# EAGLE board CT_schematic (EAGLE 7.6.0)

Size 100 x 80 mm. Coordinates in mm from the lower left corner, seen from the top.
Outline: 0,0 100,0 100,80 0,80 0,0
Copper layers (1*16): Top 0.035mm / dielectric 1.5mm / Bottom 0.035mm
Design rules "default": minimum track width 10mil, minimum drill 24mil, track to track 8mil, track to pad 8mil, pad to pad 8mil, via to via 8mil, smd to smd 8mil, copper to edge 40mil, drill to drill 8mil, minimum pad ring 10mil, minimum via ring 8mil, stop-mask expansion 4mil, vias tented up to drill 0mil, thermal gap 10mil

## Footprints (pad centres in the part's own frame; a part is rotated, then mirrored left to right if it is on the bottom)
C0603 = smd 0.8 x 0.8: 1 -0.762,0; 2 0.762,0
C0402 = smd 0.5 x 0.5: 1 -0.508,0; 2 0.508,0
C0805 = smd 1.2 x 1.3: 1 -1.016,0; 2 1.016,0
C1206 = smd 1.3 x 1.6: 1 -1.524,0; 2 1.524,0
L1210 = smd 1.2 x 2.5: 1 -1.524,0; 2 1.524,0
DR1040 = smd 1.6 x 3.2: 1 -4.458,0; 2 4.458,0
R0603 = smd 0.8 x 0.8: 1 -0.762,0; 2 0.762,0
LQFP144 = smd 0.35 x 1.35: 1 -8.75,-10.625; 2 -8.25,-10.625; 3 -7.75,-10.625; 4 -7.25,-10.625; 5 -6.75,-10.625; 6 -6.25,-10.625; 7 -5.75,-10.625; 8 -5.25,-10.625; 9 -4.75,-10.625; 10 -4.25,-10.625; 11 -3.75,-10.625; 12 -3.25,-10.625; 13 -2.75,-10.62; 14 -2.25,-10.625; 15 -1.75,-10.625; 16 -1.25,-10.625; 17 -0.75,-10.625; 18 -0.25,-10.625; 19 0.25,-10.625; 20 0.75,-10.625; 21 1.25,-10.625; 22 1.75,-10.625; 23 2.25,-10.625; 24 2.75,-10.62; 25 3.25,-10.625; 26 3.75,-10.625; 27 4.25,-10.625; 28 4.75,-10.625; 29 5.25,-10.625; 30 5.75,-10.625; 31 6.25,-10.625; 32 6.75,-10.625; 33 7.25,-10.625; 34 7.75,-10.625; 35 8.25,-10.625; 36 8.75,-10.625; 73 8.75,10.625; 74 8.25,10.625; 75 7.75,10.625; 76 7.25,10.625; 77 6.75,10.625; 78 6.25,10.625; 79 5.75,10.625; 80 5.25,10.625; 81 4.75,10.625; 82 4.25,10.625; 83 3.75,10.625; 84 3.25,10.625; 85 2.75,10.625; 86 2.25,10.625; 87 1.75,10.625; 88 1.25,10.625; 89 0.75,10.625; 90 0.25,10.625; 91 -0.25,10.625; 92 -0.75,10.625; 93 -1.25,10.625; 94 -1.75,10.625; 95 -2.25,10.625; 96 -2.75,10.625; 97 -3.25,10.625; 98 -3.75,10.625; 99 -4.25,10.625; 100 -4.75,10.625; 101 -5.25,10.625; 102 -5.75,10.625; 103 -6.25,10.625; 104 -6.75,10.625; 105 -7.25,10.625; 106 -7.75,10.625; 107 -8.25,10.625; 108 -8.75,10.625 | smd 1.35 x 0.35: 37 10.625,-8.75; 38 10.625,-8.25; 39 10.625,-7.75; 40 10.625,-7.25; 41 10.625,-6.75; 42 10.625,-6.25; 43 10.625,-5.75; 44 10.625,-5.25; 45 10.625,-4.75; 46 10.625,-4.25; 47 10.625,-3.75; 48 10.625,-3.25; 49 10.625,-2.75; 50 10.625,-2.25; 51 10.625,-1.75; 52 10.625,-1.25; 53 10.625,-0.75; 54 10.625,-0.25; 55 10.625,0.25; 56 10.625,0.75; 57 10.625,1.25; 58 10.625,1.75; 59 10.625,2.25; 60 10.625,2.75; 61 10.625,3.25; 62 10.625,3.75; 63 10.625,4.25; 64 10.625,4.75; 65 10.625,5.25; 66 10.625,5.75; 67 10.625,6.25; 68 10.625,6.75; 69 10.625,7.25; 70 10.625,7.75; 71 10.625,8.25; 72 10.625,8.75; 109 -10.625,8.75; 110 -10.625,8.25; 111 -10.625,7.75; 112 -10.625,7.25; 113 -10.625,6.75; 114 -10.625,6.25; 115 -10.625,5.75; 116 -10.625,5.25; 117 -10.625,4.75; 118 -10.625,4.25; 119 -10.625,3.75; 120 -10.625,3.25; 121 -10.625,2.75; 122 -10.625,2.25; 123 -10.625,1.75; 124 -10.625,1.25; 125 -10.625,0.75; 126 -10.625,0.25; 127 -10.625,-0.25; 128 -10.625,-0.75; 129 -10.625,-1.25; 130 -10.625,-1.75; 131 -10.625,-2.25; 132 -10.625,-2.75; 133 -10.625,-3.25; 134 -10.625,-3.75; 135 -10.625,-4.25; 136 -10.625,-4.75; 137 -10.625,-5.25; 138 -10.625,-5.75; 139 -10.625,-6.25; 140 -10.625,-6.75; 141 -10.625,-7.25; 142 -10.625,-7.75; 143 -10.625,-8.25; 144 -10.625,-8.75
A2200-A = smd 1.5 x 0.8: 1 -4.85,6.35; 2 -4.85,5.08; 3 -4.85,3.81; 4 -4.85,2.54; 5 -4.85,1.27; 6 -4.85,0; 7 -4.85,-1.27; 8 -4.85,-2.54; 9 -4.85,-3.81; 10 -4.85,-5.08; 11 -4.85,-6.35; 12 4.85,-6.35; 13 4.85,-5.08; 14 4.85,-3.81; 15 4.85,-2.54; 16 4.85,-1.27; 17 4.85,0; 18 4.85,1.27; 19 4.85,2.54; 20 4.85,3.81; 21 4.85,5.08; 22 4.85,6.35 | smd 1.2 x 1.2: 23 -2,2; 24 -2,0; 25 -2,-2; 26 0,-2; 27 0,0; 28 0,2; 29 2,2; 30 2,0; 31 2,-2
COAXIAL_C = smd 1 x 1: 1 0,-1.5; 2 0,1.5 | smd 1.05 x 2.2: 3 -1.475,0; 4 1.475,0
SOIC-8 = smd 1.6 x 0.6: 1 -2.7,1.905 | smd 1.55 x 0.6: 2 -2.7,0.635; 3 -2.7,-0.635; 4 -2.7,-1.905; 5 2.7,-1.905; 6 2.7,-0.635; 7 2.7,0.635; 8 2.7,1.905
TST-110-05-T-D-RA = drill 1 pad 1.7 square: 1 0,0 | drill 1 pad 1.7: 2 0,2.54; 3 2.54,0; 4 2.54,2.54; 5 5.08,0; 6 5.08,2.54; 7 7.62,0; 8 7.62,2.54; 9 10.16,0; 10 10.16,2.54; 11 12.7,0; 12 12.7,2.54; 13 15.24,0; 14 15.24,2.54; 15 17.78,0; 16 17.78,2.54; 17 20.32,0; 18 20.32,2.54; 19 22.86,0; 20 22.86,2.54
SSOP-16 = smd 1.981 x 0.356: 1 -2.464,2.223; 2 -2.464,1.587; 3 -2.464,0.953; 4 -2.464,0.318; 5 -2.464,-0.318; 6 -2.464,-0.953; 7 -2.464,-1.587; 8 -2.464,-2.223; 9 2.464,-2.223; 10 2.464,-1.587; 11 2.464,-0.953; 12 2.464,-0.318; 13 2.464,0.318; 14 2.464,0.953; 15 2.464,1.587; 16 2.464,2.223
HTSS-105-01-G-D = drill 1 pad 1.8 square: 1 0,0 | drill 1 pad 1.8: 2 0,2.54; 3 2.54,0; 4 2.54,2.54; 5 5.08,0; 6 5.08,2.54; 7 7.62,0; 8 7.62,2.54; 9 10.16,0; 10 10.16,2.54
LBGA-64 = smd 0.559 x 0.559: A1 -3.5,3.5; A2 -2.5,3.5; A3 -1.5,3.5; A4 -0.5,3.5; A5 0.5,3.5; A6 1.5,3.5; A7 2.5,3.5; A8 3.5,3.5; B1 -3.5,2.5; B2 -2.5,2.5; B3 -1.5,2.5; B4 -0.5,2.5; B5 0.5,2.5; B6 1.5,2.5; B7 2.5,2.5; B8 3.5,2.5; C1 -3.5,1.5; C2 -2.5,1.5; C3 -1.5,1.5; C4 -0.5,1.5; C5 0.5,1.5; C6 1.5,1.5; C7 2.5,1.5; C8 3.5,1.5; D1 -3.5,0.5; D2 -2.5,0.5; D3 -1.5,0.5; D4 -0.5,0.5; D5 0.5,0.5; D6 1.5,0.5; D7 2.5,0.5; D8 3.5,0.5; E1 -3.5,-0.5; E2 -2.5,-0.5; E3 -1.5,-0.5; E4 -0.5,-0.5; E5 0.5,-0.5; E6 1.5,-0.5; E7 2.5,-0.5; E8 3.5,-0.5; F1 -3.5,-1.5; F2 -2.5,-1.5; F3 -1.5,-1.5; F4 -0.5,-1.5; F5 0.5,-1.5; F6 1.5,-1.5; F7 2.5,-1.5; F8 3.5,-1.5; G1 -3.5,-2.5; G2 -2.5,-2.5; G3 -1.5,-2.5; G4 -0.5,-2.5; G5 0.5,-2.5; G6 1.5,-2.5; G7 2.5,-2.5; G8 3.5,-2.5; H1 -3.5,-3.5; H2 -2.5,-3.5; H3 -1.5,-3.5; H4 -0.5,-3.5; H5 0.5,-3.5; H6 1.5,-3.5; H7 2.5,-3.5; H8 3.5,-3.5
ASEK = smd 1.4 x 1: 1 -1.1,-0.8; 2 1.1,-0.8; 3 1.1,0.8; 4 -1.1,0.8
ASFL1 = smd 1.7 x 1.5: 1 -1.27,-1.1; 2 1.27,-1.1; 3 1.27,1.1; 4 -1.27,1.1
TSOT-23-5 = smd 1.3 x 0.62: 1 -1.31,0.95; 2 -1.31,0; 3 -1.31,-0.95; 4 1.31,-0.95; 5 1.31,0.95
DFN8_2X3MC = smd 0.813 x 0.305: 1 -1.398,0.75; 2 -1.398,0.25; 3 -1.398,-0.25; 4 -1.398,-0.75; 5 1.398,-0.75; 6 1.398,-0.25; 7 1.398,0.25; 8 1.398,0.75 | smd 1.753 x 1.549: 9 0,0
JST-2-SMD = smd 1 x 4.6: 1 -1,-3.7; 2 1,-3.7 | smd 1.6 x 3.4: NC1 -3.4,1.5; NC2 3.4,1.5
FCI_10118193-0001LF = smd 0.4 x 1.35: 1 -1.3,2.675; 2 -0.65,2.675; 3 0,2.675; 4 0.65,2.675; 5 1.3,2.675 | smd 1.6 x 1.4: 6 -3.2,2.45; 7 3.2,2.45 | smd 1.9 x 1.9: 8 -1.2,0; 9 1.2,0 | hole 0.5: -3.3,0; 3.3,0
SON-6 = smd 0.55 x 0.3: 1 -0.355,0.5 | smd 0.52 x 0.3: 2 -0.37,0; 3 -0.37,-0.5; 4 0.37,-0.5; 5 0.37,0; 6 0.37,0.5
SW_4-1437565-2 = smd 1.4 x 2.1: 1 -2.23,4.55; 2 -2.23,-4.55; 3 2.23,4.55; 4 2.23,-4.55
LGM67K-G1J2-24-Z = smd 0.8 x 1.4: A -2,0; C 0,0
NC7SZ125M5X = smd 1.3 x 0.7: 1 -1.3,0.95; 2 -1.3,0; 3 -1.3,-0.95; 4 1.3,-0.95; 5 1.3,0.95
DUMMY_PACKAGE_204 = drill 0.3: 1 0,-1; 2 1.5,-1; 3 3,-1

## Placement (x,y rotation side)
C1  1e-06  [C0603]  -57.15,68.58 0 top  (outside the outline)
C2  1e-07  [C0603]  -60.96,68.58 0 top  (outside the outline)
C3  1e-07  [C0603]  -64.77,68.58 0 top  (outside the outline)
C4  1e-07  [C0603]  -68.58,68.58 0 top  (outside the outline)
C5  1e-07  [C0603]  -72.39,68.58 0 top  (outside the outline)
C6  1e-07  [C0603]  -76.2,68.58 0 top  (outside the outline)
C7  1e-07  [C0603]  -15.24,73.66 0 top  (outside the outline)
C8  1e-07  [C0603]  -19.05,73.66 0 top  (outside the outline)
C9  1e-07  [C0603]  -22.86,73.66 0 top  (outside the outline)
C10  1e-07  [C0603]  -26.67,73.66 0 top  (outside the outline)
C11  1e-07  [C0603]  -30.48,73.66 0 top  (outside the outline)
C12  1e-07  [C0603]  -34.29,73.66 0 top  (outside the outline)
C13  1e-07  [C0603]  -38.1,73.66 0 top  (outside the outline)
C14  4.7e-06  [C0603]  -49.53,68.58 0 top  (outside the outline)
C15  1e-07  [C0603]  -41.91,73.66 0 top  (outside the outline)
C16  1e-07  [C0603]  -45.72,73.66 0 top  (outside the outline)
C17  1e-08  [C0603]  -49.53,73.66 0 top  (outside the outline)
C18  1e-06  [C0603]  -53.34,73.66 0 top  (outside the outline)
C19  1e-07  [C0402]  -38.1,78.74 0 top  (outside the outline)
C20  1e-08  [C0402]  -41.91,78.74 0 top  (outside the outline)
C21  1e-07  [C0402]  -45.72,78.74 0 top  (outside the outline)
C22  1e-06  [C0603]  -57.15,73.66 0 top  (outside the outline)
C23  1e-06  [C0603]  -60.96,73.66 0 top  (outside the outline)
C24  2.2e-07  [C0603]  -53.34,68.58 0 top  (outside the outline)
C25  1e-06  [C0603]  -64.77,73.66 0 top  (outside the outline)
C26  1e-06  [C0603]  -68.58,73.66 0 top  (outside the outline)
C27  1e-08  [C0402]  -49.53,78.74 0 top  (outside the outline)
C28  1e-08  [C0402]  -53.34,78.74 0 top  (outside the outline)
C29  1e-08  [C0402]  -57.15,78.74 0 top  (outside the outline)
C30  1e-08  [C0402]  -60.96,78.74 0 top  (outside the outline)
C31  1e-05  [C0805]  -72.39,55.88 0 top  (outside the outline)
C32  1e-05  [C0805]  -77.47,55.88 0 top  (outside the outline)
C33  1e-07  [C0402]  -64.77,78.74 0 top  (outside the outline)
C34  1e-05  [C1206]  -35.56,57.15 0 top  (outside the outline)
C35  1e-05  [C1206]  -41.91,57.15 0 top  (outside the outline)
C36  1e-08  [C0402]  -68.58,78.74 0 top  (outside the outline)
C37  1e-08  [C0402]  -72.39,78.74 0 top  (outside the outline)
C38  1e-08  [C0402]  -76.2,78.74 0 top  (outside the outline)
C39  1e-08  [C0402]  -15.24,83.82 0 top  (outside the outline)
I1  1e-05  [L1210]  -29.21,57.15 0 top  (outside the outline)
I2  2.5e-06  [DR1040]  -38.1,29.21 0 top  (outside the outline)
R2  1000.0  [R0603]  -72.39,73.66 0 top  (outside the outline)
R4  4700.0  [R0603]  -76.2,73.66 0 top  (outside the outline)
R5  4700.0  [R0603]  -15.24,78.74 0 top  (outside the outline)
R6  4700.0  [R0603]  -19.05,78.74 0 top  (outside the outline)
R7  2200.0  [R0603]  -22.86,78.74 0 top  (outside the outline)
R8  2200.0  [R0603]  -26.67,78.74 0 top  (outside the outline)
R9  10000.0  [R0603]  -48.26,63.5 0 top  (outside the outline)
R10  10000.0  [R0603]  -53.34,63.5 0 top  (outside the outline)
R11  10000.0  [R0603]  -58.42,63.5 0 top  (outside the outline)
R12  10000.0  [R0603]  -63.5,63.5 0 top  (outside the outline)
R13  10000.0  [R0603]  -68.58,63.5 0 top  (outside the outline)
R14  10000.0  [R0603]  -73.66,63.5 0 top  (outside the outline)
R15  100000.0  [R0603]  -27.94,63.5 0 top  (outside the outline)
R16  10000.0  [R0603]  -78.74,63.5 0 top  (outside the outline)
R17  10000.0  [R0603]  -15.24,68.58 0 top  (outside the outline)
R18  10000.0  [R0603]  -20.32,68.58 0 top  (outside the outline)
R19  10000.0  [R0603]  -25.4,68.58 0 top  (outside the outline)
R20  10000.0  [R0603]  -30.48,68.58 0 top  (outside the outline)
R21  220000.0  [R0603]  -33.02,63.5 0 top  (outside the outline)
R22  1000000.0  [R0603]  -22.86,63.5 0 top  (outside the outline)
R23  10000.0  [R0603]  -35.56,68.58 0 top  (outside the outline)
R24  10000.0  [R0603]  -40.64,68.58 0 top  (outside the outline)
R25  9100.0  [R0603]  -30.48,78.74 0 top  (outside the outline)
R26  680000.0  [R0603]  -38.1,63.5 0 top  (outside the outline)
R27  120000.0  [R0603]  -43.18,63.5 0 top  (outside the outline)
R28  2000.0  [R0603]  -34.29,78.74 0 top  (outside the outline)
R29  10000.0  [R0603]  -45.72,68.58 0 top  (outside the outline)
U1  STM32L471ZET6  [LQFP144]  -24.13,11.43 0 top  (outside the outline)
U2  A2200-A  [A2200-A]  -41.91,10.16 0 top  (outside the outline)
U3  73412-0114  [COAXIAL_C]  -21.59,49.53 0 top  (outside the outline)
U4  AT25040B-SSHL-T  [SOIC-8]  -43.18,40.64 0 top  (outside the outline)
U5  TST-110-05-T-D-RA  [TST-110-05-T-D-RA]  -58.42,46.99 0 top  (outside the outline)
U6  LTC2804CGN-1#PBF  [SSOP-16]  -74.93,27.94 0 top  (outside the outline)
U7  HTSS-105-01-G-D  [HTSS-105-01-G-D]  -27.94,39.37 0 top  (outside the outline)
U8  mt28ew256aba1HPC-0SIT  [LBGA-64]  -54.61,7.62 0 top  (outside the outline)
U9  ASEK-32.768KHz-ECST  [ASEK]  -77.47,49.53 0 top  (outside the outline)
U10  ASFL1-25MHZ-NCS  [ASFL1]  -60.96,39.37 0 top  (outside the outline)
U11  ltc3406es5  [TSOT-23-5]  -15.24,62.23 0 top  (outside the outline)
U12  MCP73831T-2ACI/MC  [DFN8_2X3MC]  -30.48,82.55 0 top  (outside the outline)
U13  S2B-PH-SM4-TB(LF)(SN)  [JST-2-SMD]  -53.34,29.21 0 top  (outside the outline)
U14  10118193-0001LF  [FCI_10118193-0001LF]  -69.85,39.37 0 top  (outside the outline)
U15  TPS3895ADRYR  [SON-6]  -24.13,82.55 0 top  (outside the outline)
U16  4-1437565-2  [SW_4-1437565-2]  -27.94,29.21 0 top  (outside the outline)
U17  Q65110A2395  [LGM67K-G1J2-24-Z]  -17.78,57.15 0 top  (outside the outline)
U18  nc7sz125m5x  [NC7SZ125M5X]  -46.99,55.88 0 top  (outside the outline)
U19  nc7sz125m5x  [NC7SZ125M5X]  -53.34,55.88 0 top  (outside the outline)
U20  nc7sz125m5x  [NC7SZ125M5X]  -59.69,55.88 0 top  (outside the outline)
U21  nc7sz125m5x  [NC7SZ125M5X]  -66.04,55.88 0 top  (outside the outline)
U22  Dummy  [DUMMY_PACKAGE_204]  -21.59,83.82 0 top  (outside the outline)

## Library data of the parts
C1-C39 I1 I2 R2 R4-R29 U1-U22 = circuit_tree

## Nets
CLK_U1_8: U1.8 U9.3
CLK_U1_23: U1.23 U10.3
GND: C1.2 C2.2 C3.2 C4.2 C5.2 C6.2 C7.2 C8.2 C9.2 C10.2 C11.2 C12.2 C13.2 C14.2 C15.2 C16.2 C17.2 C18.2 C19.2 C20.2 C21.2 C22.2 C23.2 C25.2 C26.2 C27.2 C28.2 C29.2 C30.2 C31.2 C32.1 C32.2 C33.2 C34.2 C35.2 C36.2 C37.2 C38.2 C39.2 R2.2 R9.2 R21.2 R25.2 R27.2 R28.2 U1.16 U1.30 U1.31 U1.38 U1.51 U1.61 U1.71 U1.83 U1.94 U1.107 U1.120 U1.130 U1.143 U2.7 U2.8 U2.23 U2.24 U2.25 U2.26 U2.27 U2.28 U2.29 U2.30 U2.31 U4.4 U5.4 U5.6 U5.8 U5.10 U5.12 U5.14 U5.16 U5.18 U5.20 U6.8 U7.9 U8.E8 U8.H2 U8.H7 U9.2 U10.2 U11.2 U12.6 U12.9 U13.2 U14.5 U14.6 U14.7 U14.8 U14.9 U15.2 U17.C U18.2 U18.3 U19.1 U19.3 U20.1 U20.3 U21.1 U21.3 U22.1
INPUT_USBPOWER_5V: C34.1 R29.2 U12.1 U12.2 U14.1
NET_U1_25: R6.1 U1.25 U21.4
NET_U1_128: R8.1 U1.128 U2.16
NET_U1_129: R7.1 U1.129 U2.15
NET_U1_138: R9.1 U1.138
NET_U1_140: U17.A
NET_U1_142: U16.3 U16.4
NET_U2_2: R10.2 U2.2
NET_U2_6: U2.6
NET_U2_17: R10.1 U2.17
NET_U2_19: U2.19
NET_U2_22: R5.1 U2.22 U20.4
NET_U3_1: U2.11 U3.1
NET_U3_2: U2.10 U3.2 U3.3 U3.4
NET_U4_3: R11.1 U4.3
NET_U4_7: R13.1 U4.7
NET_U6_6: C22.1 U6.6
NET_U6_7: C24.1 I1.2 U6.7
NET_U6_9: C23.1 U6.9
NET_U6_10: C24.2 U6.10
NET_U6_11: R15.1 U6.11
NET_U7_3: U6.1 U7.3
NET_U7_4: U6.2 U7.4
NET_U7_5: U6.3 U7.5
NET_U7_6: U6.4 U7.6
NET_U8_B4: R19.1 U8.B4
NET_U8_B5: R4.1 U8.B5 U19.4
NET_U11_1: U11.1
NET_U11_3: I2.1 U11.3
NET_U11_5: R21.1 R22.1 U11.5
NET_U11_ATNET_3: I2.2 R22.2
NET_U12_5: R29.1 U12.5
NET_U12_8: R28.1 U12.8
NET_U15_1: R24.1 R25.1 U15.1
NET_U15_3: R26.2 R27.1 U15.3
NET_U15_4: R23.1 U15.4 U18.4 U19.2 U20.2 U21.2
NET_U16_1: R2.1 U16.1 U16.2
PROC_FMC_A0: U1.10 U8.E2
PROC_FMC_A1: U1.11 U8.D2
PROC_FMC_A2: U1.12 U8.C2
PROC_FMC_A3: U1.13 U8.A2
PROC_FMC_A4: U1.14 U8.B2
PROC_FMC_A5: U1.15 U8.D3
PROC_FMC_A6: U1.50 U8.C3
PROC_FMC_A7: U1.53 U8.A3
PROC_FMC_A8: U1.54 U8.B6
PROC_FMC_A9: U1.55 U8.A6
PROC_FMC_A10: U1.56 U8.C6
PROC_FMC_A11: U1.57 U8.D6
PROC_FMC_A12: U1.87 U8.B7
PROC_FMC_A13: U1.88 U8.A7
PROC_FMC_A14: U1.89 U8.C7
PROC_FMC_A15: U1.90 U8.D7
PROC_FMC_A16: U1.80 U8.E7
PROC_FMC_A17: U1.81 U8.B3
PROC_FMC_A18: U1.82 U8.C4
PROC_FMC_A19: U1.2 U8.D5
PROC_FMC_A20: U1.3 U8.D4
PROC_FMC_A21: U1.4 U8.C5
PROC_FMC_A22: U1.5 U8.B8
PROC_FMC_A23: U1.1 U8.C8
PROC_FMC_D0: U1.85 U8.E3
PROC_FMC_D1: U1.86 U8.H3
PROC_FMC_D2: U1.114 U8.E4
PROC_FMC_D3: U1.115 U8.H4
PROC_FMC_D4: U1.58 U8.H5
PROC_FMC_D5: U1.59 U8.E5
PROC_FMC_D6: U1.60 U8.H6
PROC_FMC_D7: U1.63 U8.E6
PROC_FMC_D8: U1.64 U8.F3
PROC_FMC_D9: U1.65 U8.G3
PROC_FMC_D10: U1.66 U8.F4
PROC_FMC_D11: U1.67 U8.G4
PROC_FMC_D12: U1.68 U8.F5
PROC_FMC_D13: U1.77 U8.G6
PROC_FMC_D14: U1.78 U8.F6
PROC_FMC_D15: U1.79 U8.G7
PROC_FMC_NBL0: R20.1 U1.141 U8.F7
PROC_FMC_NE2: R16.1 U1.124 U8.F2
PROC_FMC_NOE: R17.1 U1.118 U8.G2
PROC_FMC_NWAIT: U1.122 U8.A4
PROC_FMC_NWE: R18.1 U1.119 U8.A5
PROC_LPUART1_CTS: U1.74 U6.13
PROC_LPUART1_RTS: U1.73 U6.15
PROC_LPUART1_RX: U1.26 U6.16
PROC_LPUART1_TX: U1.27 U6.14
PROC_PC13: U1.7 U22.2
PROC_PC15_OSC32_OUT: U1.9 U22.3
PROC_SPI1_MISO: U1.42 U4.2
PROC_SPI1_MOSI: U1.43 U4.5
PROC_SPI1_NSS: R12.1 U1.40 U4.1
PROC_SPI1_SCK: U1.41 U4.6
PROC_SYS_JTCK_SWCLK: U1.109 U5.9
PROC_SYS_JTDO_SWO: U1.133 U5.13
PROC_SYS_JTMS_SWDIO: U1.105 U5.7
RST_OUT_U5_SRESET_B: R14.1 U5.15 U18.1
VCC_S1_3V7: C31.1 C35.1 U11.4 U12.3 U12.4 U13.1
VCC_TIER1_3V3: C1.1 C2.1 C3.1 C4.1 C5.1 C6.1 C7.1 C8.1 C9.1 C10.1 C11.1 C12.1 C13.1 C14.1 C15.1 C16.1 C17.1 C18.1 C19.1 C20.1 C21.1 C25.1 C26.1 C27.1 C28.1 C29.1 C30.1 C32.2 C33.1 C36.1 C37.1 C38.1 C39.1 I1.1 I2.2 R4.2 R5.2 R6.2 R7.2 R8.2 R11.2 R12.2 R13.2 R14.2 R15.2 R16.2 R17.2 R18.2 R19.2 R20.2 R22.2 R23.2 R24.2 R26.1 U1.6 U1.17 U1.32 U1.33 U1.39 U1.52 U1.62 U1.72 U1.84 U1.95 U1.106 U1.108 U1.121 U1.131 U1.144 U2.20 U4.8 U5.1 U6.5 U6.12 U8.D8 U8.F1 U8.G5 U9.4 U10.4 U15.6 U18.5 U19.5 U20.5 U21.5

## Tracks (layer width: path | path; a pad name or v marks a point on that pad's centre or on a via)
CLK_U1_8  (1 unrouted)
CLK_U1_23  (1 unrouted)
GND  (105 unrouted)
INPUT_USBPOWER_5V  (4 unrouted)
NET_U1_25  (2 unrouted)
NET_U1_128  (2 unrouted)
NET_U1_129  (2 unrouted)
NET_U1_138  (1 unrouted)
NET_U1_142  (1 unrouted)
NET_U2_2  (1 unrouted)
NET_U2_17  (1 unrouted)
NET_U2_22  (2 unrouted)
NET_U3_1  (1 unrouted)
NET_U3_2  (3 unrouted)
NET_U4_3  (1 unrouted)
NET_U4_7  (1 unrouted)
NET_U6_6  (1 unrouted)
NET_U6_7  (2 unrouted)
NET_U6_9  (1 unrouted)
NET_U6_10  (1 unrouted)
NET_U6_11  (1 unrouted)
NET_U7_3  (1 unrouted)
NET_U7_4  (1 unrouted)
NET_U7_5  (1 unrouted)
NET_U7_6  (1 unrouted)
NET_U8_B4  (1 unrouted)
NET_U8_B5  (2 unrouted)
NET_U11_3  (1 unrouted)
NET_U11_5  (2 unrouted)
NET_U11_ATNET_3  (1 unrouted)
NET_U12_5  (1 unrouted)
NET_U12_8  (1 unrouted)
NET_U15_1  (2 unrouted)
NET_U15_3  (2 unrouted)
NET_U15_4  (5 unrouted)
NET_U16_1  (2 unrouted)
PROC_FMC_A0  (1 unrouted)
PROC_FMC_A1  (1 unrouted)
PROC_FMC_A2  (1 unrouted)
PROC_FMC_A3  (1 unrouted)
PROC_FMC_A4  (1 unrouted)
PROC_FMC_A5  (1 unrouted)
PROC_FMC_A6  (1 unrouted)
PROC_FMC_A7  (1 unrouted)
PROC_FMC_A8  (1 unrouted)
PROC_FMC_A9  (1 unrouted)
PROC_FMC_A10  (1 unrouted)
PROC_FMC_A11  (1 unrouted)
PROC_FMC_A12  (1 unrouted)
PROC_FMC_A13  (1 unrouted)
PROC_FMC_A14  (1 unrouted)
PROC_FMC_A15  (1 unrouted)
PROC_FMC_A16  (1 unrouted)
PROC_FMC_A17  (1 unrouted)
PROC_FMC_A18  (1 unrouted)
PROC_FMC_A19  (1 unrouted)
PROC_FMC_A20  (1 unrouted)
PROC_FMC_A21  (1 unrouted)
PROC_FMC_A22  (1 unrouted)
PROC_FMC_A23  (1 unrouted)
PROC_FMC_D0  (1 unrouted)
PROC_FMC_D1  (1 unrouted)
PROC_FMC_D2  (1 unrouted)
PROC_FMC_D3  (1 unrouted)
PROC_FMC_D4  (1 unrouted)
PROC_FMC_D5  (1 unrouted)
PROC_FMC_D6  (1 unrouted)
PROC_FMC_D7  (1 unrouted)
PROC_FMC_D8  (1 unrouted)
PROC_FMC_D9  (1 unrouted)
PROC_FMC_D10  (1 unrouted)
PROC_FMC_D11  (1 unrouted)
PROC_FMC_D12  (1 unrouted)
PROC_FMC_D13  (1 unrouted)
PROC_FMC_D14  (1 unrouted)
PROC_FMC_D15  (1 unrouted)
PROC_FMC_NBL0  (2 unrouted)
PROC_FMC_NE2  (2 unrouted)
PROC_FMC_NOE  (2 unrouted)
PROC_FMC_NWAIT  (1 unrouted)
PROC_FMC_NWE  (2 unrouted)
PROC_LPUART1_CTS  (1 unrouted)
PROC_LPUART1_RTS  (1 unrouted)
PROC_LPUART1_RX  (1 unrouted)
PROC_LPUART1_TX  (1 unrouted)
PROC_PC13  (1 unrouted)
PROC_PC15_OSC32_OUT  (1 unrouted)
PROC_SPI1_MISO  (1 unrouted)
PROC_SPI1_MOSI  (1 unrouted)
PROC_SPI1_NSS  (2 unrouted)
PROC_SPI1_SCK  (1 unrouted)
PROC_SYS_JTCK_SWCLK  (1 unrouted)
PROC_SYS_JTDO_SWO  (1 unrouted)
PROC_SYS_JTMS_SWDIO  (1 unrouted)
RST_OUT_U5_SRESET_B  (2 unrouted)
VCC_S1_3V7  (5 unrouted)
VCC_TIER1_3V3  (83 unrouted)